# EAGLE board rx (EAGLE 6.1)
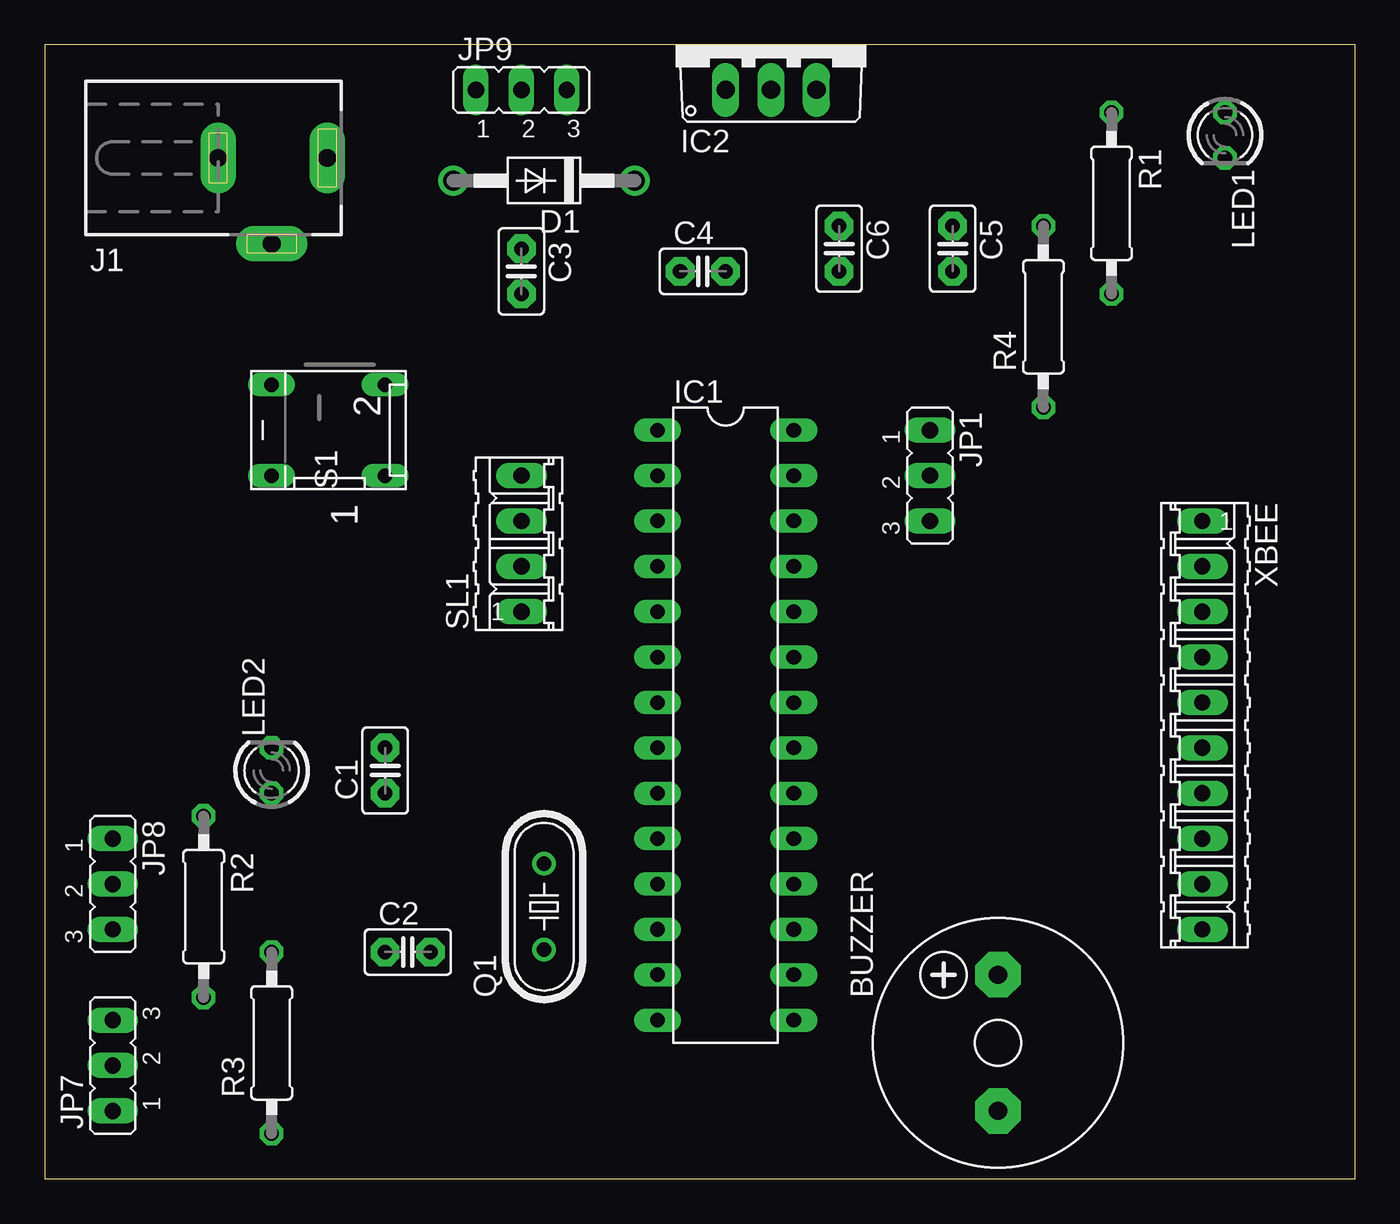
[diagram p0: board, top side]
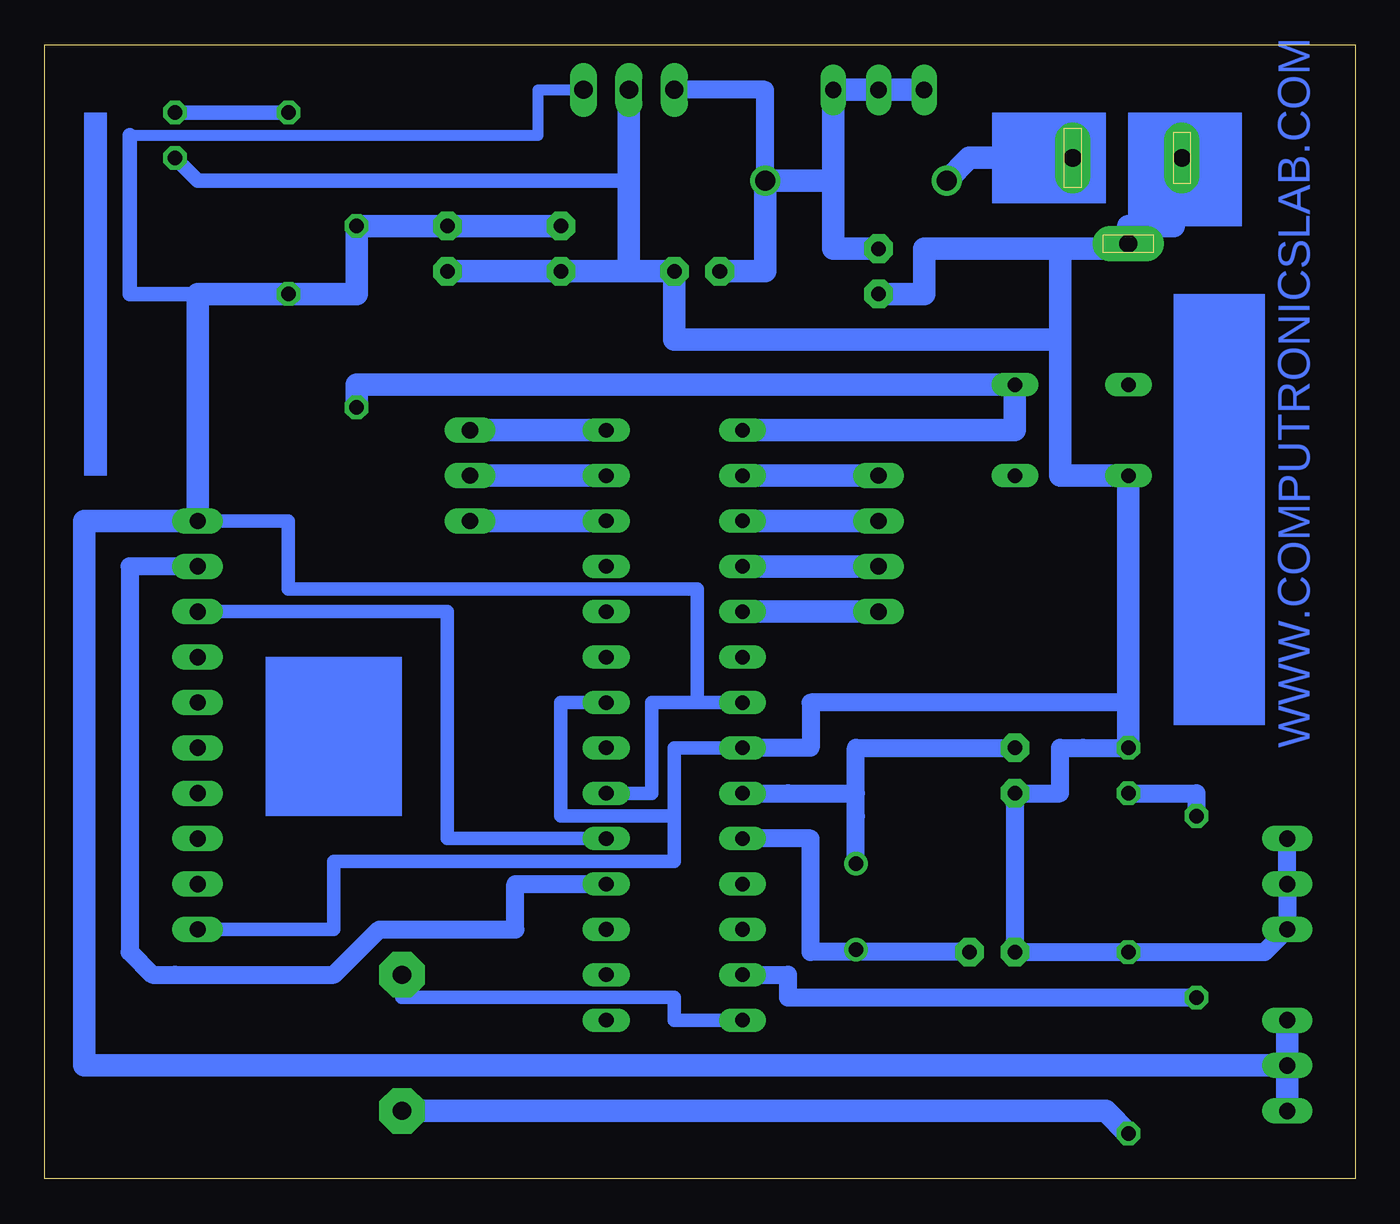
[diagram p1: board, bottom side, seen from below]

Size 73.33 x 63.49 mm. Coordinates in mm from the lower left corner, seen from the top.
Outline: 0,0 73.33,0 73.33,63.49 0,63.49 0,0
Copper layers (1*16): Top 0.035mm / dielectric 1.5mm / Bottom 0.035mm
Design rules: minimum track width 30mil, minimum drill 24mil, track to track 8mil, track to pad 8mil, pad to pad 8mil, via to via 8mil, smd to smd 8mil, copper to edge 40mil, drill to drill 8mil, minimum pad ring 10mil, minimum via ring 8mil, stop-mask expansion 4mil, vias tented up to drill 0mil, thermal gap 10mil

## Footprints (pad centres in the part's own frame; a part is rotated, then mirrored left to right if it is on the bottom)
F/CM12P = drill 1.016 pad 2.54 octagon: + 3.81,0; - -3.81,0
C2.5-2 = drill 0.813 pad 1.6 octagon: 1 -1.27,0; 2 1.27,0
DO41-10 = drill 1.118: A 5.08,0; C -5.08,0
DIL28-3 = drill 0.813 long: 1 -16.51,-3.81; 2 -13.97,-3.81; 3 -11.43,-3.81; 4 -8.89,-3.81; 5 -6.35,-3.81; 6 -3.81,-3.81; 7 -1.27,-3.81; 8 1.27,-3.81; 9 3.81,-3.81; 10 6.35,-3.81; 11 8.89,-3.81; 12 11.43,-3.81; 13 13.97,-3.81; 14 16.51,-3.81; 15 16.51,3.81; 16 13.97,3.81; 17 11.43,3.81; 18 8.89,3.81; 19 6.35,3.81; 20 3.81,3.81; 21 1.27,3.81; 22 -1.27,3.81; 23 -3.81,3.81; 24 -6.35,3.81; 25 -8.89,3.81; 26 -11.43,3.81; 27 -13.97,3.81; 28 -16.51,3.81
TO220V = drill 1.016 long: 1 -2.54,-2.54; 2 0,-2.54; 3 2.54,-2.54
DCJ0303 = drill 1 pad 2 long: 1 0,3.1; 2 4.8,0; 3 0,-3
JP2 = drill 0.914 long: 1 -2.54,0; 2 0,0; 3 2.54,0
LED3MM = drill 0.813 octagon: A -1.27,0; K 1.27,0
HC49/S = drill 0.813: 1 -2.413,0; 2 2.413,0
0207/10 = drill 0.813 octagon: 1 -5.08,0; 2 5.08,0
DP-02 = drill 0.813 long: 1 -2.54,-2.54; 2 2.54,-2.54; 3 2.54,3.81; 4 -2.54,3.81
04P = drill 0.914 long: 1 -3.81,0; 2 -1.27,0; 3 1.27,0; 4 3.81,0
10P = drill 0.914 long: 1 -11.43,0; 2 -8.89,0; 3 -6.35,0; 4 -3.81,0; 5 -1.27,0; 6 1.27,0; 7 3.81,0; 8 6.35,0; 9 8.89,0; 10 11.43,0

## Placement (x,y rotation side)
BUZZER  F/CM12P  [F/CM12P]  53.34,7.62 90 top
C1  22pf  [C2.5-2]  19.05,22.86 90 top
C2  22pf  [C2.5-2]  20.32,12.7 0 top
C3  100UF  [C2.5-2]  26.67,50.8 270 top
C4  0.1uf  [C2.5-2]  36.83,50.8 0 top
C5  0.1uf  [C2.5-2]  50.8,52.07 270 top
C6  4.7uf  [C2.5-2]  44.45,52.07 270 top
D1  1N4007  [DO41-10]  27.94,55.88 180 top
IC1  ATMEGA328  [DIL28-3]  38.1,25.4 270 top
IC2  7805  [TO220V]  40.64,63.5 0 top
J1  [DCJ0303]  12.7,57.15 270 top
JP1  [JP2]  49.53,39.37 270 top
JP7  [JP2]  3.81,6.35 90 top
JP8  [JP2]  3.81,16.51 270 top
JP9  [JP2]  26.67,60.96 0 top
LED1  [LED3MM]  66.04,58.42 270 top
LED2  [LED3MM]  12.7,22.86 90 top
Q1  16MHZ  [HC49/S]  27.94,15.24 90 top
R1  220R  [0207/10]  59.69,54.61 270 top
R2  330R  [0207/10]  8.89,15.24 270 top
R3  10K  [0207/10]  12.7,7.62 90 top
R4  10K  [0207/10]  55.88,48.26 90 top
S1  [DP-02]  16.51,41.91 90 top
SL1  [04P]  26.67,35.56 90 top
XBEE  [10P]  64.77,25.4 270 top

## Library data of the parts
BUZZER = buzzer; OC_FARNELL: unknown; OC_NEWARK: unknown
C1-C6 = capacitor-wima
D1 = diode
IC1 = quantum-research-group; OC_FARNELL: unknown; OC_NEWARK: unknown
IC2 = linear
J1 = con-jack; OC_FARNELL: unknown; OC_NEWARK: unknown
JP1 JP7-JP9 = jumper
LED1 LED2 = led
Q1 = crystal; OC_FARNELL: 1667008; OC_NEWARK: unknown
R1-R4 = rcl
S1 = switch-dil; MPN: MCDP02; OC_FARNELL: 1255233; OC_NEWARK: 26M1095
SL1 XBEE = con-amp-quick; OC_FARNELL: unknown; OC_NEWARK: unknown

## Nets
N$1: C1.2 IC1.9 Q1.2
N$2: C2.2 IC1.10 Q1.1
N$3: D1.A J1.1
N$4: C5.1 C6.1 IC1.7 IC1.20 IC2.3 JP7.1 JP7.2 JP7.3 R1.2 R4.2 XBEE.1
N$5: C1.1 C2.1 C3.2 C4.2 C5.2 C6.2 IC1.8 IC1.22 IC2.2 J1.2 J1.3 JP8.1 JP8.2 JP8.3 LED1.K LED2.K R3.2 S1.4 XBEE.10
N$6: LED1.A R1.1
N$7: C3.1 C4.1 D1.C IC2.1 JP9.1 JP9.2 JP9.3
N$8: IC1.28 JP1.1
N$9: IC1.27 JP1.2
N$10: IC1.26 JP1.3
N$11: IC1.18 XBEE.2
N$12: IC1.19 XBEE.3
N$13: BUZZER.- R3.1
N$14: IC1.5 SL1.1
N$15: IC1.2 SL1.4
N$16: IC1.3 SL1.3
N$17: IC1.4 SL1.2
N$18: BUZZER.+ IC1.14
N$21: IC1.13 R2.2
N$31: IC1.1 R4.1 S1.2
N$32: LED2.A R2.1

## Tracks (layer width: path | path; a pad name or v marks a point on that pad's centre or on a via)
N$1
  Bottom 0.762: 27.94,21.59 27.94,20.32 | 27.94,20.32 27.94,17.78 | 27.94,17.78 Q1.2 27.94,17.78 | 27.94,20.32 27.94,17.78 | 27.94,17.78 27.94,20.32
  Bottom 1.016: 27.94,21.59 31.75,21.59 IC1.9 | C1.2 27.94,24.13 27.94,20.32 27.94,17.78
N$2
  Bottom 0.762: 27.94,12.7 Q1.1 27.94,12.7
  Bottom 1.016: C2.2 27.94,12.7 30.48,12.7 30.48,19.05 IC1.10
N$3
  Bottom 0.762: 16.51,57.15 J1.1
  Bottom 1.27: D1.A 21.59,57.15 16.51,57.15
N$4
  Bottom 0.61: IC2.3 45.72,60.96 45.72,58.42 68.58,58.42
  Bottom 0.762: 36.83,26.67 39.37,26.67 39.37,21.59 IC1.20 | IC1.7 36.83,26.67 | 36.83,26.67 36.83,33.02 59.69,33.02 59.69,36.83 63.5,36.83 XBEE.1
  Bottom 0.813: 68.58,58.42 68.58,49.53 64.77,49.53
  Bottom 1.27: JP7.2 JP7.1 | JP7.2 JP7.3 | C6.1 C5.1 R4.2 55.88,49.53 R1.2 64.77,49.53 XBEE.1 71.12,36.83 71.12,6.35 | JP7.2 63.5,6.35 68.58,6.35 | 71.12,6.35 68.58,6.35 | 68.58,6.35 71.12,6.35 | 71.12,6.35 68.58,6.35
N$5
  Bottom 0.762: 40.64,50.8 40.64,52.07 | 40.64,52.07 40.64,53.34 | 40.64,55.88 43.18,55.88 | 40.64,52.07 40.64,53.34 | 40.64,53.34 40.64,52.07 | 12.7,52.07 J1.2 | 10.16,57.15 J1.3 | IC1.22 44.45,26.67 44.45,24.13 44.45,20.32 38.1,20.32 | IC1.8 38.1,24.13 38.1,20.32 | XBEE.10 57.15,13.97 57.15,16.51 57.15,17.78 53.34,17.78 40.64,17.78 38.1,17.78 38.1,20.32
  Bottom 0.813: LED1.K 64.77,55.88 43.18,55.88 40.64,55.88
  Bottom 1.016: JP8.1 JP8.2 JP8.3 5.08,12.7 R3.2 C2.1 C1.1 16.51,21.59 16.51,24.13 15.24,24.13 LED2.K | IC1.8 30.48,24.13 30.48,26.67 12.7,26.67
  Bottom 1.27: 40.64,50.8 C4.2 38.1,48.26 38.1,46.99 35.56,46.99 16.51,46.99 | IC2.2 40.64,55.88 40.64,54.61 40.64,53.34 40.64,52.07 40.64,50.8 | 40.64,50.8 C6.2 C5.2 | C3.2 24.13,49.53 24.13,52.07 16.51,52.07 | 12.7,52.07 16.51,52.07 | 10.16,57.15 10.16,53.34 12.7,53.34 J1.2 | LED2.K 12.7,26.67 S1.4 16.51,39.37 16.51,46.99 | 16.51,46.99 16.51,52.07
N$6
  Bottom 0.813: LED1.A R1.1
N$7
  Bottom 0.762: 29.21,55.88 30.48,55.88 D1.C
  Bottom 1.016: D1.C 33.02,59.69 33.02,60.96 IC2.1
  Bottom 1.27: JP9.1 JP9.2 JP9.3 29.21,55.88 | 29.21,55.88 29.21,52.07 C3.1 | C4.1 33.02,50.8 D1.C 30.48,55.88 29.21,55.88
N$8
  Bottom 1.27: JP1.1 IC1.28
N$9
  Bottom 1.27: JP1.2 IC1.27
N$10
  Bottom 1.27: JP1.3 IC1.26
N$11
  Bottom 1.016: IC1.18 46.99,16.51 46.99,13.97 48.26,13.97 54.61,13.97 57.15,11.43 66.04,11.43 67.31,11.43 68.58,12.7 68.58,34.29 XBEE.2
N$12
  Bottom 0.762: IC1.19 50.8,19.05 50.8,26.67 50.8,31.75 63.5,31.75 XBEE.3
N$13
  Bottom 1.27: R3.1 13.97,3.81 BUZZER.-
N$14
  Bottom 1.27: SL1.1 IC1.5
N$15
  Bottom 1.27: SL1.4 IC1.2
N$16
  Bottom 1.27: SL1.3 IC1.3
N$17
  Bottom 1.27: SL1.2 IC1.4
N$18
  Bottom 0.762: IC1.14 38.1,8.89 38.1,10.16 53.34,10.16 BUZZER.+
N$21
  Bottom 1.016: R2.2 11.43,10.16 26.67,10.16 31.75,10.16 31.75,11.43 IC1.13
N$31
  Bottom 1.27: IC1.1 21.59,41.91 19.05,41.91 19.05,43.18 S1.2 55.88,44.45 R4.1
N$32
  Bottom 1.016: LED2.A 8.89,21.59 R2.1
(copper drawn outside any net)
  shapes: Bottom area x5

## Text on the board
Bottom: WWW.COMPUTRONICSLAB.COM